# Altium PCB TK514_Interrupter.PcbDoc
Units mm, origin at the board's own origin, x right, y up, seen from the top; angles counter-clockwise.
Board outline 80 x 60 mm, 2 copper layers (Top Layer, Bottom Layer); 50 components, 40 nets, 176 pads, 24 vias.
Unrouted connection lines stored in the file: 1.
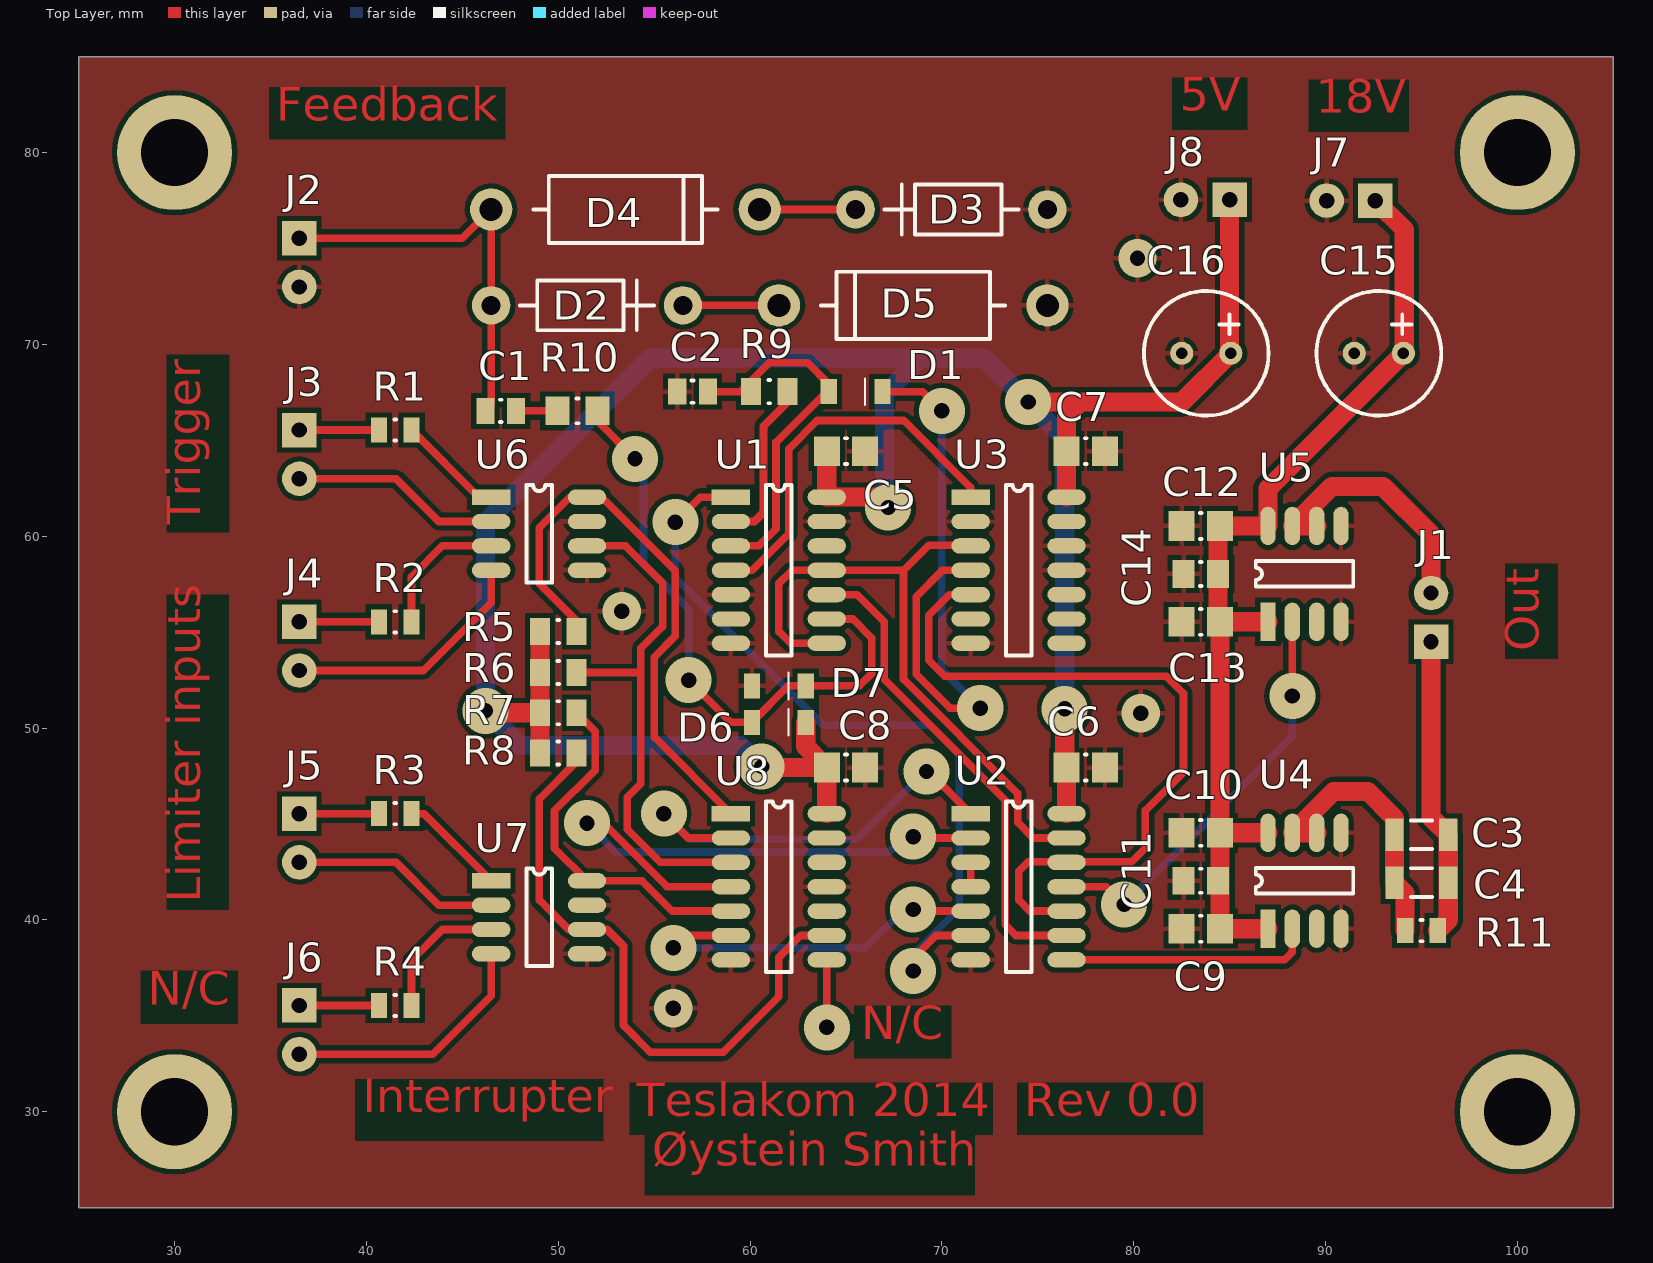
[diagram p0: Top Layer view]
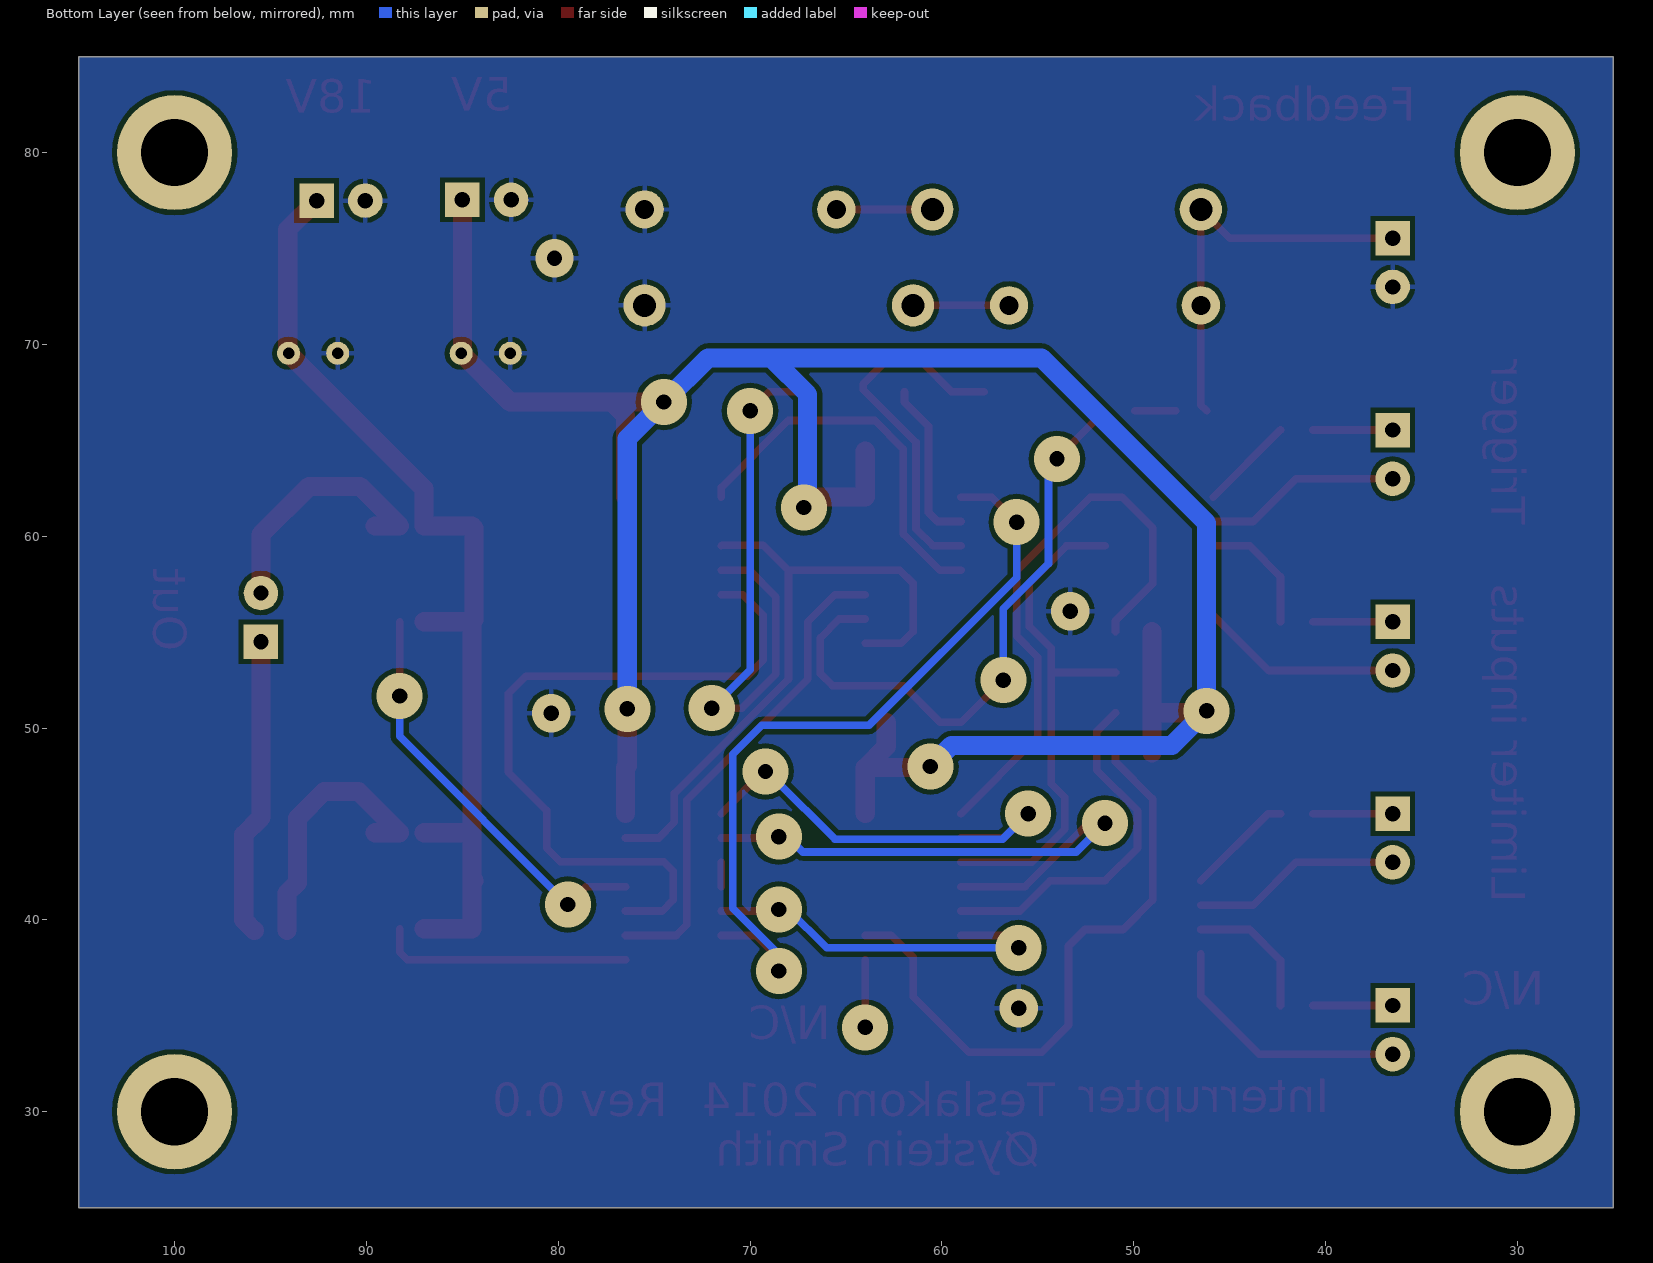
[diagram p1: Bottom Layer view, seen from below]

## Layer stack, top to bottom
Top Solder: solder mask 0.0102, Solder Resist, Dk 3.5
Top Layer: signal copper 0.0356
Dielectric1: dielectric 0.32, FR-4, Dk 4.8
Bottom Layer: signal copper 0.0356
Bottom Solder: solder mask 0.0102, Solder Resist, Dk 3.5

## Board outline
25,25 105,25 105,85 25,85

## Design rules (kind name [scope] priority, off if disabled: settings)
Clearance [All] p1: gap=0.254
PolygonConnect [All] p1: connectstyle=Relief reliefconductorwidth=0.254 reliefentries=4 polygonreliefangle="90 Angle" airgapwidth=0.254
RoutingVias [All] p1: holewidth=0.8 width=2.4 viastyle="Through Hole" minholewidth=0.8 minwidth=2.4 maxholewidth=0.8 maxwidth=3
SolderMaskExpansion [All] p1: expansion=0.102
UnpouredPolygon [All] p1: allowunpoured=FALSE
Width [All] p1: maxlimit=5 minlimit=0.4 preferedwidth=0.4
29 further rules are at their usual default settings.

## Components (designator, comment, footprint, x,y, rotation, side; value= is the part's Value field where it differs from the comment)
C1 "CAP 100nF 25V 0805(2012)" CAPC0805(2012)145_L 47,66.54 r0 top
C2 "CAP 22nF 25V 0805(2012)" CAPC0805(2012)145_L 57,67.54 r0 top
C3 "CAP 10uF 25V 1206(3216)" CAPC1206(3216)190_L 95,44.44 r0 top
C4 "CAP 10uF 25V 1206(3216)" CAPC1206(3216)190_L 95,41.94 r0 top
C5 "CAP 100nF 25V 0805(2012)" CAPC0805(2012)145_M 65,64.44 r180 top
C6 "CAP 100nF 25V 0805(2012)" CAPC0805(2012)145_M 77.5,47.94 r180 top
C7 "CAP 100nF 25V 0805(2012)" CAPC0805(2012)145_M 77.5,64.44 r180 top
C8 "CAP 100nF 25V 0805(2012)" CAPC0805(2012)145_M 65,47.94 r180 top
C9 "CAP 100nF 25V 0805(2012)" CAPC0805(2012)145_M 83.5,39.54 r0 top
C10 "CAP 100nF 25V 0805(2012)" CAPC0805(2012)145_M 83.5,44.54 r0 top
C11 "CAP 1uF 25V 0805(2012)" CAPC0805(2012)145_N 83.5,42.04 r0 top
C12 "CAP 100nF 25V 0805(2012)" CAPC0805(2012)145_M 83.5,60.54 r0 top
C13 "CAP 100nF 25V 0805(2012)" CAPC0805(2012)145_M 83.5,55.54 r0 top
C14 "CAP 1uF 25V 0805(2012)" CAPC0805(2012)145_N 83.5,58.04 r0 top
C15 "CAP" "CAP 2.5mm" 91.5,69.54 r0 top
C16 "CAP" "CAP 2.5mm" 82.5,69.54 r0 top
D1 "1N4148" 1N4148 65.5,67.54 r0 top
D2 "1N5819" 1N5819 46.5,72.04 r0 top
D3 "1N5819" 1N5819 75.5,77.04 r180 top
D4 "1N5337" 1N5337 46.5,77.04 r0 top
D5 "1N5337" 1N5337 75.5,72.04 r180 top
D6 "1N4148" 1N4148 61.5,50.3 r0 top
D7 "1N4148" 1N4148 61.5,52.2 r0 top
J1 "JST 2pin" "JST 2pin" 95.5,54.5 r0 top
J2 "JST 2pin" "JST 2pin" 36.5,75.54 r180 top
J3 "JST 2pin" "JST 2pin" 36.5,65.54 r180 top
J4 "JST 2pin" "JST 2pin" 36.5,55.54 r180 top
J5 "JST 2pin" "JST 2pin" 36.5,45.54 r180 top
J6 "JST 2pin" "JST 2pin" 36.5,35.54 r180 top
J7 "JST 2pin" "JST 2pin" 92.6,77.5 r90 top
J8 "JST 2pin" "JST 2pin" 85,77.54 r90 top
R1 "330R 5% 0805(2012)" RESC0805(2012)_L 41.5,65.54 r180 top
R2 "330R 5% 0805(2012)" RESC0805(2012)_L 41.5,55.54 r180 top
R3 "330R 5% 0805(2012)" RESC0805(2012)_L 41.5,45.54 r180 top
R4 "330R 5% 0805(2012)" RESC0805(2012)_L 41.5,35.54 r180 top
R5 "1K 5% 0805(2012)" RESC0805(2012)_N 50,55.04 r180 top
R6 "1K 5% 0805(2012)" RESC0805(2012)_N 50,52.9 r180 top
R7 "1K 5% 0805(2012)" RESC0805(2012)_N 50,50.8 r180 top
R8 "1K 5% 0805(2012)" RESC0805(2012)_N 50,48.7 r180 top
R9 "20K 1% 0805(2012)" RESC0805(2012)_N 61,67.54 r180 top
R10 "1K 1% 0805(2012)" RESC0805(2012)_M 51,66.54 r0 top
R11 "10R 5% 0805(2012)" RESC0805(2012)_L 95,39.44 r0 top
U1 "74HC14" SOP14 59,62.04 r0 top
U2 "74HC08" SOP14 71.5,45.54 r0 top
U3 "74HC74" SOP14 71.5,62.04 r0 top
U4 "MIC4422YM" SOP8 87,39.54 r90 top
U5 "MIC4422YM" SOP8 87,55.54 r90 top
U6 "MOCD207R2M" SOP8 46.5,62.04 r0 top
U7 "MOCD207R2M" SOP8 46.5,42.04 r0 top
U8 "74HC14" SOP14 59,45.54 r0 top

## Footprints (in the part's own frame and the unit in brackets; to place one, negate y for a bottom-side part, rotate by r counter-clockwise, add the part's x,y. Pads: shape width x height; smd on the part's side, far side on the other; paste and mask are expansions set on the pad)
1N4148 [mm]
  rect 0.85x1.3 smd: A(-1.4,0) K(1.4,0)
  silkscreen extent 0.5,-0.7 0.5,0.7
1N5337 [mm]
  round 2.2 hole 1.2: A(0,0) K(14,0)
  silkscreen extent 2.2,-1.75 11.8,1.75
1N5819 [mm]
  round 2 hole 1: A(0,0) K(10,0)
  silkscreen extent 1.5,-1.3 8.5,1.3
"CAP 2.5mm" [mm]
  round 1.2 hole 0.6: 1(0,0) 2(2.56,0)
  silkscreen extent -1.97,-3.25 4.53,3.25
CAPC0805(2012)145_L [mm] "Chip Capacitor, Body 2.0x1.2mm, Height 1.45mm, IPC High Density"
  rect 0.95x1.35 smd: 1(-0.8,0) 2(0.8,0)
  silkscreen extent -0.05,-0.58 0.05,0.58, body extent -1.1,-0.72 1.1,0.72, height 1.45
CAPC0805(2012)145_M [mm] "Chip Capacitor, Body 2.0x1.2mm, Height 1.45mm, IPC Low Density"
  rect 1.35x1.55 smd: 1(-1,0) 2(1,0)
  silkscreen extent -0.05,-0.67 0.05,0.67, body extent -1.1,-0.72 1.1,0.72, height 1.45
CAPC0805(2012)145_N [mm] "Chip Capacitor, Body 2.0x1.2mm, Height 1.45mm, IPC Medium Density"
  rect 1.15x1.45 smd: 1(-0.9,0) 2(0.9,0)
  silkscreen extent -0.05,-0.62 0.05,0.63, body extent -1.1,-0.72 1.1,0.73, height 1.45
CAPC1206(3216)190_L [mm] "Chip Capacitor, Body 3.2x1.6mm, Height 1.9mm, IPC High Density"
  rect 0.95x1.7 smd: 1(-1.4,0) 2(1.4,0)
  silkscreen extent -0.55,-0.75 0.55,0.75, body extent -1.7,-0.9 1.7,0.9, height 1.9
"JST 2pin" [mm]
  rect 1.8x1.8 hole 0.8: 1(0,0)
  round 1.8 hole 0.8: 2(0,2.54)
RESC0805(2012)_L [mm] "Chip Resistor, Body 2.0x1.3mm, IPC High Density"
  rect 0.85x1.3 smd: 1(-0.85,0) 2(0.85,0)
  silkscreen extent -0.05,-0.55 0.05,0.55, body extent -1.1,-0.67 1.1,0.68, height 0.7
RESC0805(2012)_M [mm] "Chip Resistor, Body 2.0x1.3mm, IPC Low Density"
  rect 1.25x1.5 smd: 1(-1.05,0) 2(1.05,0)
  silkscreen extent -0.05,-0.65 0.05,0.65, body extent -1.1,-0.67 1.1,0.67, height 0.7
RESC0805(2012)_N [mm] "Chip Resistor, Body 2.0x1.3mm, IPC Medium Density"
  rect 1.05x1.4 smd: 1(-0.95,0) 2(0.95,0)
  silkscreen extent -0.05,-0.6 0.05,0.6, body extent -1.1,-0.67 1.1,0.68, height 0.7
SOP8 [mm]
  rect 2x0.8 smd: 1(0,0)
  oval 2x0.8 smd: 2(0,-1.27) 3(0,-2.54) 4(0,-3.81) 5(5,-3.81) 6(5,-2.54) 7(5,-1.27) 8(5,0)
  silkscreen extent 1.84,-4.44 3.17,0.64
SOP14 [mm]
  rect 2x0.8 smd: 1(0,0)
  oval 2x0.8 smd: 2(0,-1.27) 3(0,-2.54) 4(0,-3.81) 5(0,-5.08) 6(0,-6.35) 7(0,-7.62) 8(5,-7.62) 9(5,-6.35) 10(5,-5.08) 11(5,-3.81) 12(5,-2.54) 13(5,-1.27) 14(5,0)
  silkscreen extent 1.84,-8.25 3.17,0.64

## Part data
C1: library part CMP-1036-04410-1, "CAP 100nF 25V ±10% 0805 (2012 Metric) Thickness 1.45mm SMD"
C2: library part CMP-1036-04050-1, "CAP 22nF 25V ±5% 0805 (2012 Metric) Thickness 1.45mm SMD"
C3 C4: library part CMP-1037-04979-1, "CAP 10uF 25V ±10% 1206 (3216 Metric) Thickness 1.9mm SMD"
C5 C6 C7 C8 C9 C10 C12 C13: library part CMP-1036-04408-1, "CAP 100nF 25V ±5% 0805 (2012 Metric) Thickness 1.45mm SMD"
C11 C14: library part CMP-1036-04752-1, "CAP 1uF 25V ±5% 0805 (2012 Metric) Thickness 1.45mm SMD"
R1 R2 R3 R4: library part CMP-1013-00062-1, "330R 0.125W 5% 0805 (2012 Metric)  SMD"
R5 R6 R7 R8: library part CMP-1013-00074-1, "1K 0.125W 5% 0805 (2012 Metric)  SMD"
R9: library part CMP-1013-00655-1, "20K 0.125W 1% 0805 (2012 Metric)  SMD"
R10: library part CMP-1013-00510-1, "1K 0.125W 1% 0805 (2012 Metric)  SMD"
R11: library part CMP-1013-00026-1, "10R 0.125W 5% 0805 (2012 Metric)  SMD"

## Free pads (board coordinates)
  round 6 hole 3.5: 0(30,30) 1(30,80) 2(100,80) 3(100,30)

## Via types
v1: diameter 2.4, hole 0.8, Top Layer to Bottom Layer, 20 vias
v2: diameter 2, hole 0.8, Top Layer to Bottom Layer, 4 vias

## Nets (pads, with @x,y where several pads share a name; then routed paths per layer and width w, separated by ;. In a path a pad name is that pad's centre, name@x,y a point inside that pad or via, vN(x,y) a via of type N, cw(c..) or ccw(c..) an arc to the next point about the centre after c; other vN are vias at no path point)
+5: C5.2 C6.2 C7.2 C8.2 C16.2 D6.K J8.1 R5.2 R6.2 R7.2 R8.2 U1.14 U2.14 U3.14 U8.14 | length 137.8
  Top Layer w1: v1(46.2,50.9) 46.3,50.8 R7.2 ; R8.2 R7.2 ; R5.2 R6.2 R7.2 ; v1(60.6,48) 60.66,47.94 C8.2 ; D6.K 62.9,49.04 C8.2 ; U8.14 C8.2 ; C5.2 U1.14 66.66,62.04 v1(67.2,61.5) ; v1(74.5,67) 77.2,67 ; v1(76.4,51) 76.4,48.04 C6.2 U2.14 ; U3.14 C7.2 76.5,66.3 77.2,67 ; J8.1 85,69.6 C16.2 82.52,67 77.2,67
  Bottom Layer w1: v1(60.6,48) 59.5,49.1 48,49.1 v1(46.2,50.9) 46.2,60.7 54.8,69.3 68.9,69.3 ; v1(67.2,61.5) 67,61.7 67,67.4 68.9,69.3 ; v1(76.4,51) 76.4,65.1 v1(74.5,67) 72.2,69.3 68.9,69.3
+18: C9.2 C10.2 C11.2 C12.2 C13.2 C14.2 C15.2 J7.1 U4.1 U4.8 U5.1 U5.8 | length 51.7
  Top Layer w1: U4.1 C9.2 84.5,41.94 C11.2 84.5,42.14 C10.2 ; U4.8 C10.2 ; U5.1 C13.2 ; J7.1 94.1,76 94.1,69.58 C15.2 87,62.48 U5.8 C12.2 84.4,60.44 C14.2 84.4,55.64 C13.2 ; C10.2 C13.2
GND: C2.1 C5.1 C6.1 C7.1 C8.1 C9.1 C10.1 C11.1 C12.1 C13.1 C14.1 C15.1 C16.1 D3.A D5.A D7.A J2.2 J7.2 J8.2 U1.5 U1.7 U1.13 U2.7 U3.2 U3.7 U3.11 U3.12 U4.4 U4.5 U5.4 U5.5 U6.5 U6.7 U7.5 U7.7 U8.7 U8.11 U8.13
  other v2: 56,35.4 80.373,50.773 53.3,56.1 80.2,74.5
NetC1_1: C1.1 D2.A D4.A J2.1 | length 21.2
  Top Layer w0.4: J2.1 45,75.54 D4.A D2.A 46.5,66.84 C1.1
NetC1_2: C1.2 R10.1 | length 2.1
  Top Layer w0.4: C1.2 R10.1
NetC2_2: C2.2 D1.A R9.2 U1.3 | length 18.8
  Top Layer w0.4: C2.2 59.5,67.54 61,69.04 63,69.04 64.1,67.94 64.1,67.64 61.354,64.894 61.354,60.394 60.46,59.5 U1.3
NetC3_1: C3.1 C4.1 R11.1 U4.6 U4.7 | length 14.2
  Top Layer w1: U4.6 U4.7 90.43,46.7 92.2,46.7 93.6,45.3 C3.1 C4.1 94.15,41.39 R11.1
NetC3_2: C3.2 C4.2 J1.1 R11.2 | length 15.7
  Top Layer w1: J1.1 95.5,45.34 C3.2 C4.2 96.4,39.99 R11.2
NetD1_K: D1.K R9.1 U1.2 U3.4 | length 41.1
  Top Layer w0.4: U1.2 60.23,60.77 60.7,61.24 60.7,65.74 61.95,66.99 R9.1 ; D1.K 67.9,67.54 69,67.54 v1(70,66.54) ; U3.4 70.03,58.23 68.654,56.854 68.654,52.811 70.425,51.04 v1(72,51.04)
  Bottom Layer w0.4: v1@69,66.54 v1(70,66.54) 70,53.04 v1(72,51.04)
NetD2_K: D2.K D5.K | length 5
  Top Layer w0.4: D2.K D5.K
NetD3_K: D3.K D4.K | length 5
  Top Layer w0.4: D4.K D3.K
NetD6_A: D6.A D7.K R10.2 U1.9 | length 32.1
  Top Layer w0.4: R10.2 52.05,65.99 v1(54,64.04) ; v1(56.8,52.5) 59,50.3 D6.A 62,52.2 D7.K 65.7,52.2 66.346,52.846 66.346,54.694 65.35,55.69 U1.9
  Bottom Layer w0.4: v1(54,64.04) 54.446,63.594 54.446,58.569 56.8,56.215 v1(56.8,52.5)
NetJ1_2: J1.2 U5.6 U5.7 | length 13.4
  Top Layer w1: U5.6 U5.7 90.33,62.6 93,62.6 95.5,60.1 J1.2
NetJ3_1: J3.1 R1.2 | length 4.1
  Top Layer w0.4: J3.1 R1.2
NetJ3_2: J3.2 U6.2 | length 10.9
  Top Layer w0.4: J3.2 41.54,63 43.77,60.77 U6.2
NetJ4_1: J4.1 R2.2 | length 4.1
  Top Layer w0.4: J4.1 R2.2
NetJ4_2: J4.2 U6.4 | length 13.2
  Top Layer w0.4: J4.2 42.96,53 46.5,56.54 U6.4
NetJ5_1: J5.1 R3.2 | length 4.1
  Top Layer w0.4: J5.1 R3.2
NetJ5_2: J5.2 U7.2 | length 10.9
  Top Layer w0.4: J5.2 41.54,43 43.77,40.77 U7.2
NetJ6_1: J6.1 R4.2 | length 4.1
  Top Layer w0.4: J6.1 R4.2
NetJ6_2: J6.2 U7.4 | length 13.4
  Top Layer w0.4: J6.2 43.46,33 46.5,36.04 U7.4
NetR1_1: R1.1 U6.1 | length 4.9
  Top Layer w0.4: R1.1 U6.1@45.85,62.04
NetR2_1: R2.1 U6.3 | length 7.2
  Top Layer w0.4: R2.1 42.35,57.89 43.96,59.5 U6.3
NetR3_1: R3.1 U7.1 | length 5.6
  Top Layer w0.4: R3.1 43,45.54 U7.1
NetR4_1: R4.1 U7.3 | length 7.2
  Top Layer w0.4: R4.1 42.35,37.89 43.96,39.5 U7.3
NetR5_1: R5.1 U6.8 U8.1 | length 30.3
  Top Layer w0.4: R5.1 50.95,55.59 49,57.54 49,60.448 50.592,62.04 U6.8 52.26,62.04 56.1,58.2 56.1,54.8 55,53.7 55,49.54 U8.1
NetR6_1: R6.1 U6.6 U8.3 | length 27.8
  Top Layer w0.4: R6.1 54.3,52.9 ; U6.6 53.5,59.5 55.446,57.554 55.446,55.3 54.3,54.154 54.3,52.9 ; U8.3 55.325,43 53.6,44.725 53.6,46.4 54.3,47.1 54.3,52.9
NetR7_1: R7.1 U7.8 U8.5 | length 18.9
  Top Layer w0.4: R7.1 51.929,49.821 51.929,47.812 49.8,45.683 49.8,43.74 U7.8 54.36,42.04 55.94,40.46 U8.5
NetR8_1: R8.1 U7.6 U8.9 | length 32.9
  Top Layer w0.4: R8.1 50.95,48.25 49,46.3 49,41.04 50.54,39.5 U7.6 52.54,39.5 53.4,38.64 53.4,34.5 54.8,33.1 58.6,33.1 61.5,36 61.5,38.04 62.65,39.19 U8.9
NetU1_1: U1.1 U2.6 | length 41.4
  Top Layer w0.4: v1(56.1,60.74) 57.4,62.04 U1.1 ; v1(68.5,37.34) 68.5,37.995 69.695,39.19 U2.6
  Bottom Layer w0.4: v1(56.1,60.74) 56.1,57.84 63.8,50.14 69.4,50.14 70.9,48.64 70.9,40.6 68.5,38.2 v1(68.5,37.34)
NetU1_4: U1.4 U3.1 | length 20.3
  Top Layer w0.4: U1.4 60.115,58.23 62.008,60.123 62.008,64.548 63.5,66.04 68,66.04 71.5,62.54 U3.1
NetU1_8: U1.8 U1.11 U2.13 U3.3 | length 34.6
  Top Layer w0.4: U1.8 62.12,54.42 61.5,55.04 61.5,57.54 62.19,58.23 U1.11 68,58.23 ; U3.3 71.46,59.54 69.31,59.54 68,58.23 ; U2.13 74.77,44.27 73.954,45.086 73.954,46.586 68,52.54 68,58.23
NetU1_10: U1.10 U2.9 | length 25.4
  Top Layer w0.4: U1.10 65.58,56.96 67,55.54 67,52.54 73.3,46.24 73.3,39.74 73.85,39.19 U2.9
NetU2_1: U2.1 U8.2 | length 23.7
  Top Layer w0.4: v1@55.5,45.04 56,45.04 56.77,44.27 U8.2 ; v1(69.2,47.74) 69.2,47.84 U2.1
  Bottom Layer w0.4: v1(55.5,45.54) 56.84,44.2 65.571,44.2 68.705,47.335 68.3,47.74 v1(69.2,47.74)
NetU2_2: U2.2 U8.4 | length 31.2
  Top Layer w0.4: v1(51.5,45.04) 52.36,45.04 55.67,41.73 U8.4 ; v1(68.5,44.34) 68.05,44.34 68,44.29 68,44.04 68.23,44.27 U2.2
  Bottom Layer w0.4: v1(51.5,45.04) 53,43.54 67.25,43.54 68.05,44.34 v1(68.5,44.34)
NetU2_3: U2.3 U2.4 | length 1.3
  Top Layer w0.4: U2.4 U2.3
NetU2_5: U2.5 U8.6 | length 21.3
  Top Layer w0.4: v1(56,38.54) 56.65,39.19 U8.6 ; v1(68.5,40.54) 68,40.54 68,40.04 68.42,40.46 U2.5
  Bottom Layer w0.4: v1(56,38.54) 66,38.54 68,40.54 v1(68.5,40.54)
NetU2_8: U2.8 U4.2 | length 13.2
  Top Layer w0.4: U2.8 87.88,37.92 88.27,38.31 U4.2
NetU2_10: U2.10 U2.12 U3.5 | length 39.2
  Top Layer w0.4: U3.5 70.383,56.96 69.308,55.885 69.308,53.54 70.148,52.7 81.7,52.7 82.6,51.8 82.6,47.7 80.6,45.7 80.6,43.74 79.9,43.04 74.5,43.04 74,42.54 74,41.04 74.58,40.46 U2.10
NetU2_11: U2.11 U5.2 | length 21.8
  Top Layer w0.4: U2.11 78.57,41.73 v1(79.5,40.8) ; v1(88.27,51.67) U5.2
  Bottom Layer w0.4: v1(79.5,40.8) 88.27,49.57 v1(88.27,51.67)
pads on no net: U1.6 U1.12 U3.6 U3.8 U3.9 U3.10 U3.13 U4.3 U5.3 U8.8 U8.10 U8.12
copper on no net: | length 3.5
  Top Layer w0.4: v1(64,34.4) 64,37.92

## Polygon pours and split planes (outlines as drawn)
GND on Top Layer "B" (solid, pour order 2): 25,25 25,85 105,85 105,25 25,25
GND on Bottom Layer "B" (solid, pour order 4): 25,25 25,85 105,85 105,25 25,25

## Other copper
Top Layer:
  text "5V" at 82.4,81.6 h3
  text "18V" at 89.5,81.5 h3
  text "Feedback" at 35.3,81.1 h3
  text "Trigger" at 31.9,60.6 h3 r90
  text "Out" at 101.7,54 h3 r90
  text "Limiter inputs" at 31.9,40.9 h3 r90
  text "N/C" at 28.6,35 h3
  text "N/C" at 65.8,33.2 h3
  text "Interrupter" at 39.8,29.4 h3
  text "Teslakom 2014" at 54.1,29.2 h3
  text "Rev 0.0" at 74.3,29.2 h3
  text "Øystein Smith" at 54.9,26.6 h3